# Altium PCB ESP32Programmer.PcbDoc
Units mm, origin at the board's own origin, x right, y up, seen from the top; angles counter-clockwise.
Board outline 52.4 x 18 mm, 2 copper layers (Top Layer, Bottom Layer), stack 1.57 mm thick; 38 components, 24 nets, 126 pads, 116 vias.
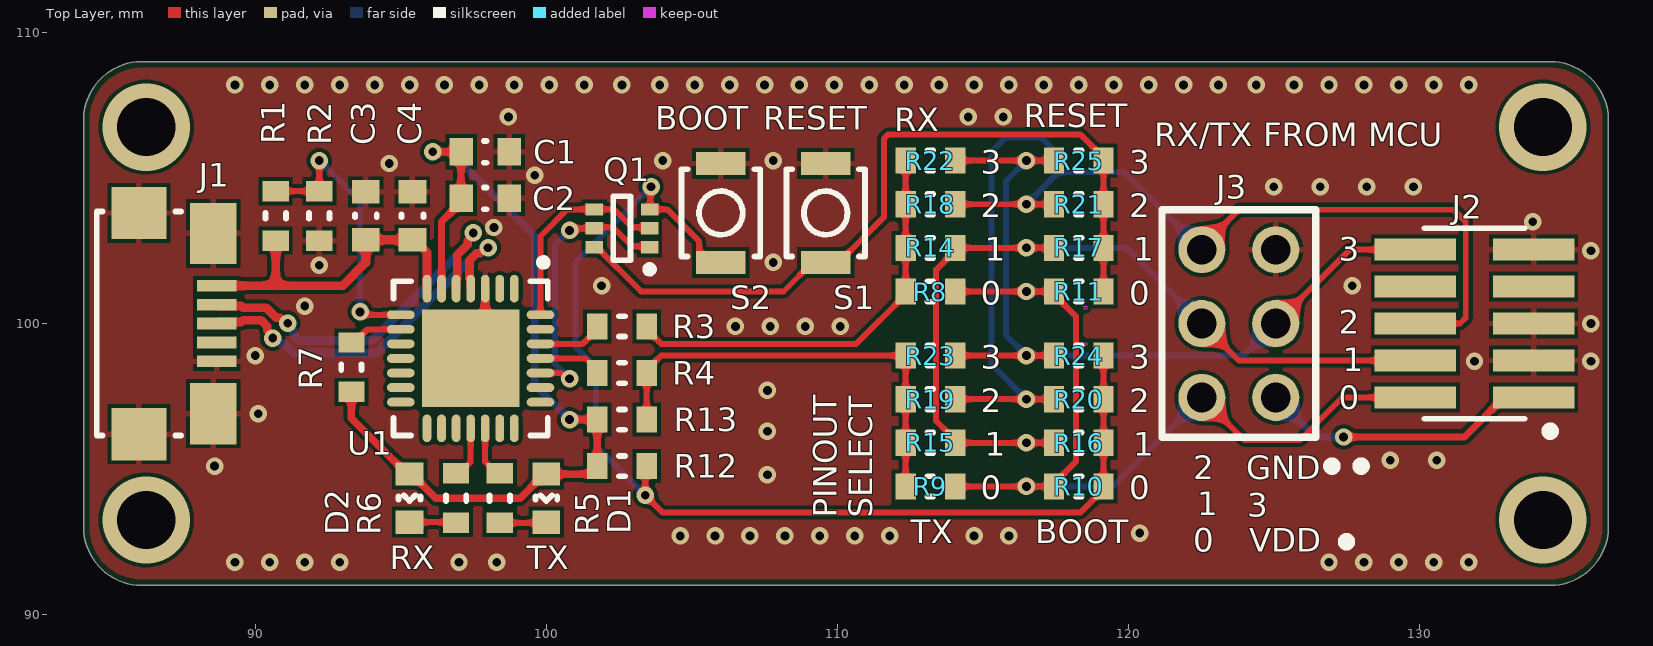
[diagram p0: Top Layer view]
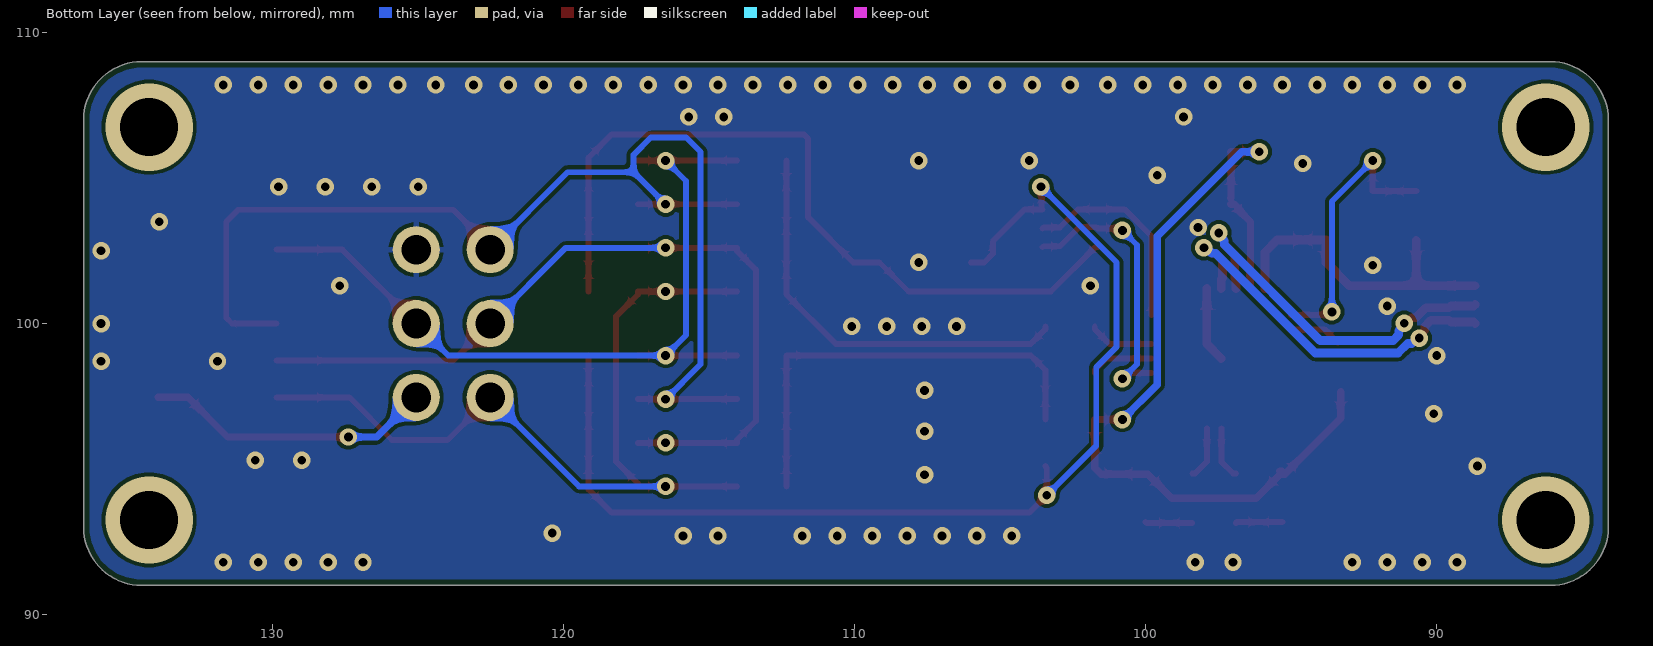
[diagram p1: Bottom Layer view, seen from below]
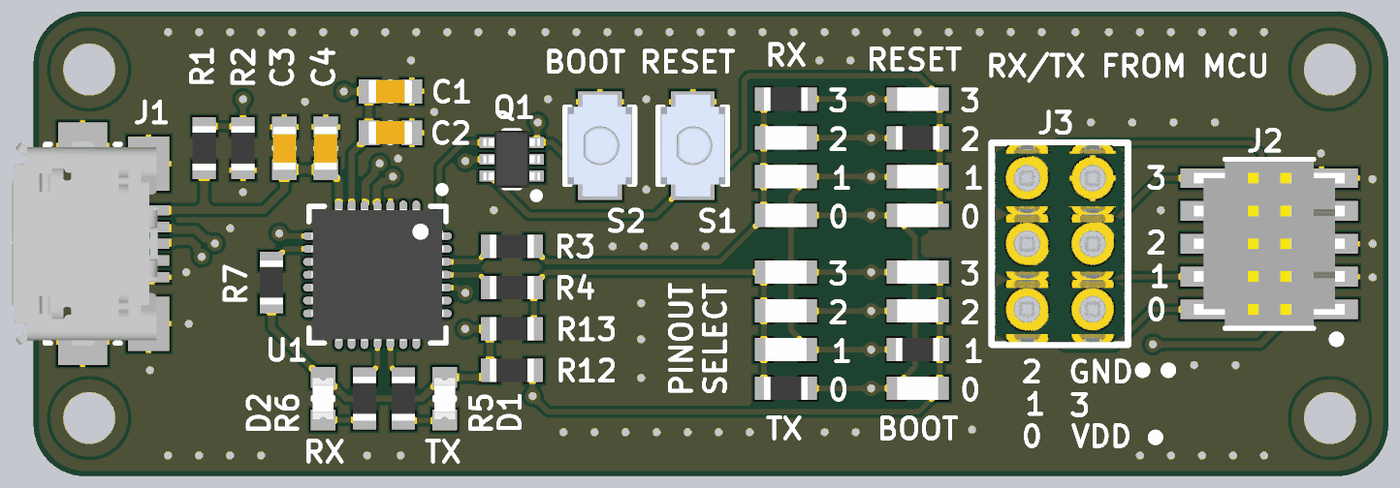
[diagram p2: 3D render of the assembled board from above, using the file's embedded part models]

## Layer stack, top to bottom
Top Solder: solder mask 0.0127, Solder Resist, Dk 3.8
Top Layer: signal copper 0.035
Dielectric: core 1.5, FR-4, Dk 4.5
Bottom Layer: signal copper 0.035
Bottom Solder: solder mask 0.0127, Solder Resist, Dk 3.8

## Board outline
84.1,93 84.1,107 cw(c86.1,107) 86.1,109 134.5,109 cw(c134.5,107) 136.5,107 136.5,93 cw(c134.5,93) 134.5,91 86.1,91 cw(c86.1,93)

## Design rules (kind name [scope] priority, off if disabled: settings)
BoardOutlineClearance [All] p1: gap=0.2 ignorepadtopadclearanceinfootprint=FALSE
Clearance [All] p1: gap=0.127 ignorepadtopadclearanceinfootprint=FALSE except(0.25: Arc-Hole Track-Hole SMDPad-Hole THPad-Hole Via-Hole Fill-Hole Poly-Hole Region-Hole Text-Hole)
ComponentClearance [All] p1: gap=0.127 collisioncheckmode=3 verticalgap=0.127 showdistances=TRUE
DiffPairsRouting [All] p1: maxlimit=0.127 minlimit=0.127 mostfreqgap=0.127 toplayer_minwidth=0.3 toplayer_maxwidth=0.3 toplayer_prefwidth=0.3 bottomlayer_minwidth=0.3 bottomlayer_maxwidth=0.3 bottomlayer_prefwidth=0.3 impedanceprofiledriven=TRUE impedanceprofileid={8DA9B725-9442-458C-9C26-8CCA449BAAD7} impedanceprofilevalue=90.000000 maxuncoupledlength=12.7
Height [All] p1: minheight=0 maxheight=1816.048 prefheight=12.7
HoleSize [All] p1: absolutevalues=TRUE maxlimit=6.3 minlimit=0.3 maxpercent=80.000 minpercent=20.000
HoleToHoleClearance [All] p1: gap=0.25 allowstackedmicrovias=FALSE
MinimumAnnularRing [All] p1: minimumring=0.13
MinimumSolderMaskSliver [All] p1: minsoldermaskwidth=0
PlaneClearance [All] p1: clearance=0.127
PlaneConnect PlaneConnectPowerPads [InPadClass('PowerPads')] p1: planeconnectstyle=Direct reliefexpansion=0.508 reliefentries=4 reliefconductorwidth=0.254 reliefairgap=0.254
PlaneConnect [All] p2: pad.planeconnectstyle=Relief pad.reliefexpansion=0.3 pad.reliefentries=4 pad.reliefconductorwidth=0.127 pad.reliefairgap=0.127 via.planeconnectstyle=Direct via.reliefexpansion=0.3 via.reliefentries=4 via.reliefconductorwidth=0.127 via.reliefairgap=0.127
PolygonConnect PolygonConnectPowerPads [All vs (InPadClass('PowerPads'))] p1: connectstyle=Direct reliefconductorwidth=0.254 reliefentries=4 polygonreliefangle="90 Angle" airgapwidth=0.254
PolygonConnect [All] p2: thpad.connectstyle=Relief thpad.reliefconductorwidth=0.203 thpad.reliefentries=4 thpad.polygonreliefangle="90 Angle" thpad.airgapwidth=0.127 smdpad.connectstyle=Relief smdpad.reliefconductorwidth=0.203 smdpad.reliefentries=4 smdpad.polygonreliefangle="90 Angle" smdpad.airgapwidth=0.127 via.connectstyle=Direct via.reliefconductorwidth=0.127 via.reliefentries=4 via.polygonreliefangle="90 Angle" via.airgapwidth=0.127
RoutingVias [All] p1: holewidth=0.3 width=0.6 viastyle="Through Hole" minholewidth=0.3 minwidth=0.6 maxholewidth=0.6 maxwidth=6.6
SilkToSilkClearance [All] p1: silktosilkclearance=0
SilkToSolderMaskClearance [IsPad] p1: minsilkscreentomaskgap=0.127 clearancetoexposedcopper=TRUE
SolderMaskExpansion [All] p1: expansion=0.075 istentingtop=FALSE
Width [All] p1: maxlimit=25.4 minlimit=0.127 preferedwidth=0.127 minimp=50.000000 maximp=50.000000 favimp=50.000000
20 further rules are at their usual default settings.

## Classes and differential pairs
differential pair USB_DATA: +USB_DATA_P -USB_DATA_N

## Components (designator, comment, footprint, x,y, rotation, side; value= is the part's Value field where it differs from the comment)
C1 "Capacitor" CAPC1608X09N 97.9,105.9 r180 top value=4.7uF
C2 "Capacitor" CAPC1608X09N 97.9,104.3 r180 top value=0.1uF
C3 "Capacitor" CAPC1608X09N 93.8,103.7 r270 top value=4.7uF
C4 "Capacitor" CAPC1608X09N 95.4,103.7 r270 top value=0.1uF
D1 "LED" DIOC1608X09N 100,94 r270 top
D2 "LED" DIOC1608X09N 95.3,94 r270 top
J1 "10118192-0001LF" 10118192-0001LF 86,100 r270 top
J2 "FTSH-105-01-L-DV-K-TR" FTSH-105-01-L-DV-K-TR 131.9,100 r90 top
J3 "0010977066" "3X2 MALE HEADER" 123.8,100 r90 top
Q1 "DMN63D8LDW-7" SOT65P210X110-6N 102.598,103.273 r180 top
R1 "Resistor" RESC1608X06N 90.7,103.7 r90 top value=22.1k
R2 "Resistor" RESC1608X06N 92.2,103.7 r270 top value=47.5k
R3 "Resistor" RESC1608X06N 102.6,99.9 r180 top value=1k
R4 "Resistor" RESC1608X06N 102.6,98.3 r180 top value=1k
R5 "Resistor" RESC1608X06N 98.4,94 r90 top value=1k
R6 "Resistor" RESC1608X06N 96.9,94 r90 top value=1k
R7 "Resistor" RESC1608X06N 93.3,98.5 r90 top value=1k
R8 "Resistor" RESC1608X06N 113.2,101.1 r0 top value=0
R9 "Resistor" RESC1608X06N 113.2,94.4 r0 top value=0
R10 "Resistor" RESC1608X06N 118.3,94.4 r180 top value=0
R11 "Resistor" RESC1608X06N 118.3,101.1 r180 top value=0
R12 "Resistor" RESC1608X06N 102.6,95.1 r0 top value=10k
R13 "Resistor" RESC1608X06N 102.6,96.7 r0 top value=10k
R14 "Resistor" RESC1608X06N 113.2,102.6 r0 top value=0
R15 "Resistor" RESC1608X06N 113.2,95.9 r0 top value=0
R16 "Resistor" RESC1608X06N 118.3,95.9 r180 top value=0
R17 "Resistor" RESC1608X06N 118.3,102.6 r180 top value=0
R18 "Resistor" RESC1608X06N 113.2,104.1 r0 top value=0
R19 "Resistor" RESC1608X06N 113.2,97.4 r0 top value=0
R20 "Resistor" RESC1608X06N 118.3,97.4 r180 top value=0
R21 "Resistor" RESC1608X06N 118.3,104.1 r180 top value=0
R22 "Resistor" RESC1608X06N 113.2,105.6 r0 top value=0
R23 "Resistor" RESC1608X06N 113.2,98.9 r0 top value=0
R24 "Resistor" RESC1608X06N 118.3,98.9 r180 top value=0
R25 "Resistor" RESC1608X06N 118.3,105.6 r180 top value=0
S1 "B3U-1000P" B3U-1000P 109.6,103.8 r90 top
S2 "B3U-1000P" B3U-1000P 106,103.8 r90 top
U1 "CP2102N-A02-GQFN28R" QFN50P500X500X80_HS-29N 97.4,98.8 r270 top

## Footprints (in the part's own frame and the unit in brackets; to place one, negate y for a bottom-side part, rotate by r counter-clockwise, add the part's x,y. Pads: shape width x height; smd on the part's side, far side on the other; paste and mask are expansions set on the pad)
"3X2 MALE HEADER" [mm] "CONN HEADER VERT 6POS 2.54MM"
  round 1.62 hole 1.02: 1(-2.54,-1.27) 2(-2.54,1.27) 3(0,-1.27) 4(0,1.27) 5(2.54,-1.27) 6(2.54,1.27)
  silkscreen extent -3.91,-2.64 3.91,2.64, body extent -3.81,-2.54 3.81,2.54, height 10.43
10118192-0001LF [mm] "Conn Micro USB 2.0 Type B RCP 5 POS 0.65mm Solder RA SMD 5 Terminal 1 Port T/R"
  rect 0.4x1.35 smd: 1(-1.3,2.675) 2(-0.65,2.675) 3(0,2.675) 4(0.65,2.675) 5(1.3,2.675)
  rect 1.8x1.9 smd: 6(-3.8,0) 6(3.8,0)
  rect 2.1x1.6 smd: 6(-3.1,2.55) 6(3.1,2.55)
  silkscreen extent -3.85,-1.45 3.85,1.45, body extent -3.96,-2.76 3.96,2.9, height 2.75
B3U-1000P [mm] "SWITCH TACTILE SPST-NO 0.05A 12V"
  rect 0.8x1.7 smd: 1(-1.7,0) 2(1.7,0)
  silkscreen extent -1.5,-1.35 1.5,1.35, body extent -2,-1.26 2,1.24, height 1.6
CAPC1608X09N [mm] "Chip Capacitor, 2-Leads, Body 1.60x0.80mm, IPC Medium Density"
  rect 0.8x0.95 smd: 1(-0.825,0) 2(0.825,0)
  silkscreen extent -0.05,-0.38 0.05,0.38, body extent -0.85,-0.45 0.85,0.45, height 0.9
DIOC1608X09N [mm] "Chip Diode, 2-Leads, Body 1.60x0.80mm, IPC Medium Density"
  rect 0.8x0.95 smd: 1(-0.825,0) 2(0.825,0)
  silkscreen extent -0.1,-0.38 0.1,0.38, body extent -0.8,-0.4 0.8,0.4, height 0.8
FTSH-105-01-L-DV-K-TR [mil] "CONN HEADER SMD 10POS 1.27MM"
  rect 30x110 smd: 1(-100,-80) 2(-100,80) 3(-50,-80) 4(-50,80) 5(0,-80) 6(0,80) 7(50,-80) 8(50,80) 9(100,-80) 10(100,80)
  silkscreen extent -150,-106 129,67, body extent -125,-115 125,115, height 240
QFN50P500X500X80_HS-29N [mm] "QFN, 28-Leads, Body 5.00x5.00mm, Pitch 0.50mm, Thermal Pad 3.35x3.35mm, IPC Medium Density"
  oval 0.95x0.3 smd: 1(-2.4,1.5) 2(-2.4,1) 3(-2.4,0.5) 4(-2.4,0) 5(-2.4,-0.5) 6(-2.4,-1) 7(-2.4,-1.5) 15(2.4,-1.5) 16(2.4,-1) 17(2.4,-0.5) 18(2.4,0) 19(2.4,0.5) 20(2.4,1) 21(2.4,1.5)
  oval 0.3x0.95 smd: 8(-1.5,-2.4) 9(-1,-2.4) 10(-0.5,-2.4) 11(0,-2.4) 12(0.5,-2.4) 13(1,-2.4) 14(1.5,-2.4) 22(1.5,2.4) 23(1,2.4) 24(0.5,2.4) 25(0,2.4) 26(-0.5,2.4) 27(-1,2.4) 28(-1.5,2.4)
  rect 3.35x3.35 smd: 29(0,0)
  silkscreen extent -3.42,-2.65 2.65,2.65, body extent -2.55,-2.55 2.55,2.55, height 0.8
RESC1608X06N [mm] "Chip Resistor, 2-Leads, Body 1.60x0.80mm, IPC Medium Density"
  rect 0.7x0.9 smd: 1(-0.85,0) 2(0.85,0)
  silkscreen extent -0.1,-0.35 0.1,0.35, body extent -0.85,-0.45 0.85,0.45, height 0.55
SOT65P210X110-6N [mm] "SOT23, 6-Leads, Body 2.00x2.10mm, Pitch 0.65mm, IPC Medium Density"
  rect 0.6x0.42 smd: 1(-0.95,0.65) 2(-0.95,0) 3(-0.95,-0.65) 4(0.95,-0.65) 5(0.95,0) 6(0.95,0.65)
  silkscreen extent -1.08,-1.1 0.3,1.53, body extent -1.1,-1.1 1.1,1.1, height 1.1

## Part data
C1 C3: "General purpose capacitor", Package=0603, Rated Voltage=10V
C2 C4: "General purpose capacitor", Package=0603, Rated Voltage=50V
D1 D2: "General purpose LED"
J1: "Conn Micro USB 2.0 Type B RCP 5 POS 0.65mm Solder RA SMD 5 Terminal 1 Port T/R", Color=Black, Current Rating=1.8A, Flammability Rating="UL94 V-0", Insulation Resistance=1GR, Manufacturer="Framatome Connectors", Max Operating Temperature=85°C, Max Voltage Rating (AC)=100V, Min Operating Temperature=-55°C, Package Quantity=1400, ComponentLink1Description=https://datasheet.ciiva.com/26853/getdatasheetpartid-418041-26853891.pdf?src-supplier=Verical, ComponentLink1URL=https://datasheet.ciiva.com/26853/getdatasheetpartid-418041-26853891.pdf?src-supplier=Verical, ComponentLink2Description=https://datasheet.ciiva.com/851/10118192-851112.pdf?src-supplier=Digi-Key, ComponentLink2URL=https://datasheet.ciiva.com/851/10118192-851112.pdf?src-supplier=Digi-Key, ComponentLink3Description=https://datasheet.ciiva.com/4598/10118192ac-197249-4598796.pdf?src-supplier=Mouser, ComponentLink3URL=https://datasheet.ciiva.com/4598/10118192ac-197249-4598796.pdf?src-supplier=Mouser, ComponentLink4Description=http://datasheet.octopart.com/10118192-0001LF-FCI-datasheet-55953129.pdf?src-supplier=TME, ComponentLink4URL=http://datasheet.octopart.com/10118192-0001LF-FCI-datasheet-55953129.pdf?src-supplier=TME, ComponentLink5Description=http://datasheet.octopart.com/10118192-0001LF-FCI-datasheet-13423637.pdf?src-supplier=Allied+Electronics, ComponentLink5URL=http://datasheet.octopart.com/10118192-0001LF-FCI-datasheet-13423637.pdf?src-supplier=Allied+Electronics, ComponentLink6Description=http://datasheet.octopart.com/10118192-0001LF-Amphenol-datasheet-96019471.pdf?src-supplier=Newark, ComponentLink6URL=http://datasheet.octopart.com/10118192-0001LF-Amphenol-datasheet-96019471.pdf?src-supplier=Newark, ComponentLink7Description=http://datasheet.octopart.com/10118192-0001LF-Amphenol-ICC-datasheet-96019471.pdf?src-supplier=Element14, ComponentLink7URL=http://datasheet.octopart.com/10118192-0001LF-Amphenol-ICC-datasheet-96019471.pdf?src-supplier=Element14, ComponentLink8Description=http://datasheet.octopart.com/10118192-0001LF-Amphenol-ICC-datasheet-55953129.pdf?src-supplier=Future+Electronics, ComponentLink8URL=http://datasheet.octopart.com/10118192-0001LF-Amphenol-ICC-datasheet-55953129.pdf?src-supplier=Future+Electronics, ComponentLink9Description=http://datasheet.octopart.com/10118192-0001LF-Amphenol-ICC-datasheet-13423637.pdf?src-supplier=Allied+Electronics, ComponentLink9URL=http://datasheet.octopart.com/10118192-0001LF-Amphenol-ICC-datasheet-13423637.pdf?src-supplier=Allied+Electronics, ComponentLink10Description=http://datasheet.octopart.com/10118192-0001LF-ICC-datasheet-96019471.pdf?src-supplier=Farnell, ComponentLink10URL=http://datasheet.octopart.com/10118192-0001LF-ICC-datasheet-96019471.pdf?src-supplier=Farnell, ComponentLink11Description=http://datasheet.octopart.com/10118192-0001LF-ICC-datasheet-55953129.pdf?src-supplier=Farnell, ComponentLink11URL=http://datasheet.octopart.com/10118192-0001LF-ICC-datasheet-55953129.pdf?src-supplier=Farnell, Connector Type=USB, Contact Material="Copper Alloy", Contact Plating=Gold, Depth=5.57mm, Features=Shielded, Gender=Receptacle, Housing Material=Polymer, Lead Free="Lead Free", Length=7.86mm, Manufacturer Part Number=10118192-0001LF, Mount="Surface Mount", Number of Contacts=5, Number of Ports=1, Number of Terminals=5, Orientation="Right Angle", Packaging="Tape and Reel", Pitch=0.65mm, Pricing 1="1 = 0.43000, 10 = 0.40500, 25 = 0.36440, 50 = 0.32400, 100 = 0.31040, 250 = 0.28344, 500 = 0.26994 (USD)", Radiation Hardening=No, REACH SVHC="No SVHC", Stock 1=43734, Supplier 1=Digi-Key, Termination=Solder, USB Standard="USB 2.0", Voltage Rating=100V
J2: "SAMTEC - FTSH-105-01-L-DV-K-TR - CONNECTOR, HEADER, 10 POSITION, 2ROW, 1.27MM", Color=Black, Current Rating=1.75A, Manufacturer=Samtec, Max Operating Temperature=125°C, Min Operating Temperature=-55°C, Package Quantity=550, Category="Headers and Wire Housings", ComponentLink1Description=https://datasheet.ciiva.com/739/ftsh-1xx-xx-xxx-dv-xxx-mkt-739005.pdf?src-supplier=Digi-Key, ComponentLink1URL=https://datasheet.ciiva.com/739/ftsh-1xx-xx-xxx-dv-xxx-mkt-739005.pdf?src-supplier=Digi-Key, ComponentLink2Description=https://datasheet.ciiva.com/23735/81359-23735917.pdf?src-supplier=Newark, ComponentLink2URL=https://datasheet.ciiva.com/23735/81359-23735917.pdf?src-supplier=Newark, ComponentLink3Description=https://datasheet.ciiva.com/10245/ftsh-mt-10245289.pdf?src-supplier=Avnet, ComponentLink3URL=https://datasheet.ciiva.com/10245/ftsh-mt-10245289.pdf?src-supplier=Avnet, Connector Type="Male Pin", Contact Material=Bronze, Contact Mating Length=0.12inch, Contact Plating=Gold, Depth=3.43mm, Gender=Male, Housing Color=Black, Housing Material=Polymer, Lead Free="Lead Free", Length=6.35mm, Manufacturer Part Number=FTSH-105-01-L-DV-K-TR, Max Current Rating=1.75A, Mount="Surface Mount", Number of Contacts=10, Number of Positions=10, Number of Rows=2, Orientation=Straight, Packaging="Tape and Reel", Pitch=1.27mm, Pricing 1="1=3.60000, 10=3.45800, 100=2.88200 (USD)", Radiation Hardening=No, REACH SVHC="No SVHC", RoHS=Yes, Row Spacing=0.05inch, Stock 1=307, Supplier 1=Digi-Key, Termination=Solder
J3: "Conn Unshrouded Header HDR 6 POS 2.54mm Solder ST Thru-Hole C-GridR Bag", Color=Black, Contact Resistance=15mR, Manufacturer=Molex, Max Operating Temperature=105°C, Min Operating Temperature=-40°C, Category="Headers and Wire Housings", ComponentLink1Description=https://datasheet.ciiva.com/742/010879125-sd-742670.pdf?src-supplier=Digi-Key, ComponentLink1URL=https://datasheet.ciiva.com/742/010879125-sd-742670.pdf?src-supplier=Digi-Key, ComponentLink2Description=https://datasheet.ciiva.com/10087/0010977066-pcb-headers-10087740.pdf?src-supplier=Avnet, ComponentLink2URL=https://datasheet.ciiva.com/10087/0010977066-pcb-headers-10087740.pdf?src-supplier=Avnet, Connector Type="Male Pin", Contact Material="Copper Alloy", Contact Mating Length=0.32inch, Contact Plating=Gold, Contact Type="Male Pin", Depth=5.08mm, Gender=Male, Housing Color=Black, Housing Material=Polymer, Length=7.62mm, Manufacturer Part Number=0010977066, Mount="Through Hole", Number of Contacts=6, Number of Positions=6, Number of Rows=2, Orientation=Straight, Packaging=Bulk, Pitch=2.54mm, Pricing 1="1=0.51000, 10=0.43300, 100=0.33700, 1000=0.26481, 5000=0.23271, 10000=0.21666 (USD)", RoHS=Yes, RoHS Compliant=Yes, Row Spacing=0.1inch, Series="C-Grid® 70280", Stock 1=5007, Supplier 1=Digi-Key, Termination=Solder
Q1: "DIODES INC. - DMN63D8LDW-7 - Dual MOSFET, N Channel, 30 V, 260 mA, 2.8 ohm, SOT-363, Surface Mount", Case/Package=SOT-363, Continuous Drain Current (ID)=260mA, Drain to Source Breakdown Voltage=30V, Drain to Source Resistance=2.8R, Gate to Source Voltage (Vgs)=20V, Input Capacitance=22pF, Manufacturer=Diodes, Max Operating Temperature=150°C, Max Power Dissipation=300mW, Min Operating Temperature=-55°C, Package Quantity=3000, Power Dissipation=400mW, Threshold Voltage=1.5V, Category=MOSFETs, ComponentLink1Description=https://datasheet.ciiva.com/30023/dmn63d8ldw-30023824.pdf?src-supplier=Avnet, ComponentLink1URL=https://datasheet.ciiva.com/30023/dmn63d8ldw-30023824.pdf?src-supplier=Avnet, ComponentLink2Description=https://datasheet.ciiva.com/6384/dmn63d8ldw-6384534.pdf?src-supplier=Digi-Key, ComponentLink2URL=https://datasheet.ciiva.com/6384/dmn63d8ldw-6384534.pdf?src-supplier=Digi-Key, Contact Plating=Tin,Matte, Drain to Source Voltage (Vdss)=30V, Element Configuration=Dual, Fall Time=6.3ns, FET Type="2 N-Channel", Height=1mm, Lead Free="Lead Free", Length=2.2mm, Manufacturer Part Number=DMN63D8LDW-7, Mount="Surface Mount", Number of Channels=2, Number of Elements=2, Number of Pins=6, Packaging="Tape and Reel", Pricing 1="1=0.30000, 10=0.24300, 25=0.20360, 100=0.09950, 250=0.09796, 500=0.08302, 1000=0.05768 (USD)", Radiation Hardening=No, Rds On Max=2.8R, REACH SVHC="No SVHC", Rise Time=3.2ns, RoHS=Yes, Stock 1=67979, Supplier 1=Digi-Key, Turn-Off Delay Time=12ns, Turn-On Delay Time=3.3ns, Weight=0.000212oz, Width=1.35mm
R1 R2 R3 R4 R5 R6 R7 R8 R9 R10 R11 R12 R13 R14 R15 R16 R17 R18 R19 R20 R21 R22 R23 R24 R25: "General purpose resistor", Package=0603
S1 S2: "OMRON ELECTRONIC COMPONENTS         B3U-1000P            SWITCH, SPST-NO, 0.05A, 12V, SMD", Contact Current Rating=50mA, Contact Resistance=100mR, Insulation Resistance=100MR, Manufacturer=Omron, Max Operating Temperature=70°C, Max Voltage Rating (DC)=12V, Min Operating Temperature=-25°C, Operating Force=1.5N, Package Quantity=1, Ratings="Dust Proof,IP40", Actuator Length=0.4mm, Actuator Type=Standard, ComponentLink1Description=https://datasheet.ciiva.com/26917/getdatasheetpartid-552554-26917552.pdf?src-supplier=Verical, ComponentLink1URL=https://datasheet.ciiva.com/26917/getdatasheetpartid-552554-26917552.pdf?src-supplier=Verical, ComponentLink2Description=https://datasheet.ciiva.com/22696/1685550-22696214.pdf?src-supplier=Element14, ComponentLink2URL=https://datasheet.ciiva.com/22696/1685550-22696214.pdf?src-supplier=Element14, ComponentLink3Description=https://datasheet.ciiva.com/1532/1685550-1532680.pdf?src-supplier=Element14, ComponentLink3URL=https://datasheet.ciiva.com/1532/1685550-1532680.pdf?src-supplier=Element14, ComponentLink4Description=https://datasheet.ciiva.com/1634/1685550-1634396.pdf?src-supplier=Farnell, ComponentLink4URL=https://datasheet.ciiva.com/1634/1685550-1634396.pdf?src-supplier=Farnell, ComponentLink5Description=https://datasheet.ciiva.com/14142/b3u-eng-datasheet-14142540.pdf?src-supplier=Distrelec, ComponentLink5URL=https://datasheet.ciiva.com/14142/b3u-eng-datasheet-14142540.pdf?src-supplier=Distrelec, ComponentLink6Description=https://datasheet.ciiva.com/2900/b3u-1110-2900029.pdf?src-supplier=Digi-Key, ComponentLink6URL=https://datasheet.ciiva.com/2900/b3u-1110-2900029.pdf?src-supplier=Digi-Key, ComponentLink7Description=https://datasheet.ciiva.com/16155/en-b3u-16155021.pdf?src-supplier=Onlinecomponents.com, ComponentLink7URL=https://datasheet.ciiva.com/16155/en-b3u-16155021.pdf?src-supplier=Onlinecomponents.com, ComponentLink8Description=https://datasheet.ciiva.com/2900/b3u-1110-2900030.pdf?src-supplier=Digi-Key, ComponentLink8URL=https://datasheet.ciiva.com/2900/b3u-1110-2900030.pdf?src-supplier=Digi-Key, ComponentLink9Description=https://datasheet.ciiva.com/16862/70176037-16862846.pdf?src-supplier=Allied+Electronics, ComponentLink9URL=https://datasheet.ciiva.com/16862/70176037-16862846.pdf?src-supplier=Allied+Electronics, ComponentLink10Description=https://datasheet.ciiva.com/2900/b3u-1110-2900031.pdf?src-supplier=Digi-Key, ComponentLink10URL=https://datasheet.ciiva.com/2900/b3u-1110-2900031.pdf?src-supplier=Digi-Key, Contact Material=Silver, Current Rating=50mA, Depth=2.5mm, Electrical Life=200000Cycles, Height=1.2mm, Illumination Type=Non-Illuminated,Illuminated, Lead Free="Lead Free", Length=4mm, Manufacturer Part Number=B3U-1000P, Max Current Rating=50mA, Mechanical Life=200000Cycles, Mount="Surface Mount", Orientation=Straight, Packaging="Tape and Reel", Pricing 1="1=0.84000, 10=0.80700, 25=0.76080, 50=0.66960, 100=0.60880, 250=0.57836, 500=0.56312, 1000=0.44137 (USD)", REACH SVHC=Unknown, RoHS=Yes, Stock 1=38234, Supplier 1=Digi-Key, Switch Function=Off-Mom, Switch Travel=0.15mm, Termination=SMD/SMT, Throw Configuration=SPST, Voltage Rating (DC)=12V, Weight=0.000776oz, Width=3mm
U1: "Full Speed USB to UART Bridge USB 2.0 3.3V T/R Automotive 28-Pin QFN EP", Manufacturer="Silicon Labs", ComponentLink1Description=https://4donline.ihs.com/images/VipMasterIC/IC/SILC/SILC-S-A0007770867/SILC-S-A0007770867-1.pdf?hkey=6D3A4C79FDBF58556ACFDE234799DDF0&src-supplier=Farnell, ComponentLink1URL=https://4donline.ihs.com/images/VipMasterIC/IC/SILC/SILC-S-A0007770867/SILC-S-A0007770867-1.pdf?hkey=6D3A4C79FDBF58556ACFDE234799DDF0&src-supplier=Farnell, Manufacturer Part Number=CP2102N-A02-GQFN28R, Pricing 1="1=1.47000 (USD)", RoHS=Yes, Stock 1=16070, Supplier 1=Digi-Key

## Via types
v1: diameter 0.6, hole 0.3, Top Layer to Bottom Layer, tented both sides, 112 vias
v2: diameter 3, hole 2, Top Layer to Bottom Layer, 4 vias

## Nets (pads, with @x,y where several pads share a name; then routed paths per layer and width w, separated by ;. In a path a pad name is that pad's centre, name@x,y a point inside that pad or via, vN(x,y) a via of type N, cw(c..) or ccw(c..) an arc to the next point about the centre after c; other vN are vias at no path point)
3V3: C1.2 C2.2 D1.1 D2.1 R7.1 R12.1 R13.1 U1.6 | length 30.9
  Top Layer w0.254: R7.1 93.3,96.75 D2.1@95.225,94.825 ; D2.1 95.375,94.825 96.2,94 99.1,94 99.925,94.825 D1.1 101.527,94.825 101.75,95.048 R12.1 R13.1 v1(100.8,96.7) ; D2.1@95.325,94.925 D2.1@95.4,94.925 ; v1(96.1,105.9) C1.2 97.067,105.892 97.067,104.308 C2.2 ; U1.6 96.4,103.5 96.802,103.902 96.802,103.952 96.95,104.1 C2.2@97.075,104.1
  Bottom Layer w0.254: v1(96.1,105.9) 96.7,105.9 99.6,103 99.6,97.9 v1(100.8,96.7)
DTR: Q1.2 Q1.4 U1.28 | length 7.1
  Top Layer w0.203: U1.28 99.8,103 100.723,103.923 Q1.4 102.328,103.923 102.944,103.307 103.514,103.307 Q1.2
GND: C1.1 C2.1 C3.1 C4.1 J1.5 J1.6 J2.3 J2.5 J2.9 J3.5 R2.2 S1.2 S2.2 U1.3 U1.29 | length 2.6
  Top Layer w0.3: U1.29 97.9,99.3 U1.3
  other v1: 89.3,91.8 90.5,91.8 91.7,91.8 92.9,91.8 97,91.8 98.3,91.8 126.9,91.8 128.1,91.8 129.3,91.8 130.5,91.8 131.7,91.8 104.6,92.7 105.8,92.7 107,92.7 108.2,92.7 109.4,92.7 110.6,92.7 111.8,92.7 114.7,92.7 115.9,92.7 120.4,92.8 107.6,94.8 88.6,95.1 129,95.3 130.6,95.3 107.6,96.3 90.1,96.9 107.6,97.7 131.9,98.7 135.9,98.7 90,98.9 106.5,99.9 107.7,99.9 108.9,99.9 110.1,99.9 135.9,100 91.7,100.6 101.9,101.3 127.7,101.3 92.2,102 107.8,102.1 135.9,102.5 98.2,103.3 133.9,103.5 125,104.7 126.6,104.7 128.2,104.7 129.8,104.7 99.6,105.1 94.6,105.5 104,105.6 107.8,105.6 98.7,107.1 114.5,107.1 115.7,107.1 89.3,108.2 90.5,108.2 91.7,108.2 92.9,108.2 94.1,108.2 95.3,108.2 96.5,108.2 97.7,108.2 98.9,108.2 100.1,108.2 101.3,108.2 102.6,108.2 103.9,108.2 105.1,108.2 106.3,108.2 107.5,108.2 108.7,108.2 109.9,108.2 111.1,108.2 112.3,108.2 113.5,108.2 114.7,108.2 115.9,108.2 117.1,108.2 118.3,108.2 119.5,108.2 120.7,108.2 121.9,108.2 123.1,108.2 124.4,108.2 125.7,108.2 126.9,108.2 128.1,108.2 129.3,108.2 130.5,108.2 131.7,108.2
IO0: J2.2 J3.2 R8.2 R9.2 R10.2 R11.2 | length 30
  Top Layer w0.203: R9.2 R10.2 117.45,94.5 118.2,95.25 118.2,100.25 117.45,101 R11.2 R8.2 ; J3.2 123.99,96 125.9,96 127.36,97.46 J2.2
  Bottom Layer w0.203: v1(116.5,94.4) 119.47,94.4 J3.2
  other v1: 116.5,101.1
IO1: J2.4 J3.4 R14.2 R15.2 R16.2 R17.2 | length 29
  Top Layer w0.203: R16.2 R15.2 114.05,96 113.4,96.65 113.4,101.85 114.05,102.5 R14.2 R17.2 ; J3.4 123.8,98.73 J2.4
  Bottom Layer w0.203: v1(116.5,102.6) 119.93,102.6 J3.4
  other v1: 116.5,95.9
IO2: J2.6 J3.6 R18.2 R19.2 R20.2 R21.2 | length 41.7
  Top Layer w0.203: R19.2 R20.2 ; R18.2 R21.2 ; J3.6 122.53,102.64 123.8,103.91 131.19,103.91 131.6,103.5 131.6,100.2 131.4,100 J2.6
  Bottom Layer w0.203: v1(116.5,97.4) 115.3,98.6 115.3,105.9 115.8,106.4 117,106.4 117.6,105.8 117.6,105.2 ; v1(116.5,104.1) 117.6,105.2 ; J3.6 119.87,105.2 117.6,105.2
IO3: J2.10 J3.3 R22.2 R23.2 R24.2 R25.2 | length 28.9
  Top Layer w0.203: R23.2 v1(116.5,98.9) R24.2 ; R22.2 R25.2 ; J3.3 127.61,102.54 J2.10
  Bottom Layer w0.203: v1(116.5,105.6) 115.8,104.9 115.8,99.6 v1(116.5,98.9) 123.97,98.9 124.87,99.8 J3.3@124.87,100
MCU_BOOT: Q1.3 R10.1 R12.2 R16.1 R20.1 R24.1 S2.1 | length 38.9
  Top Layer w0.203: R12.2 103.4,95.05 v1(103.4,94.1) 104,93.5 118.35,93.5 119.15,94.3 R16.1 R20.1 R24.1 ; v1(103.6,104.7) 103.574,104.674 103.574,103.949 Q1.3 104.153,103.923 105.252,102.825 105.252,102.398 105.55,102.1 S2.1
  Bottom Layer w0.203: v1(103.4,94.1) 101.7,95.8 101.7,98.5 101,99.2 101,102.1 v1(103.6,104.7)
MCU_RESET: Q1.6 R11.1 R17.1 R21.1 R25.1 S1.1 | length 26.9
  Top Layer w0.203: Q1.6 101.738,102.623 103.261,101.1 108.15,101.1 109.15,102.1 110.05,102.1 111.6,103.65 111.6,106.35 111.75,106.5 118.35,106.5 119.15,105.7 R25.1 R21.1 R17.1 R11.1
MCU_RX: R3.1 R8.1 R14.1 R18.1 R22.1 | length 14.5
  Top Layer w0.203: R3.1 103.45,99.8 103.95,99.3 110.65,99.3 112.35,101 R14.1 R18.1 R22.1
MCU_TX: R4.1 R9.1 R13.2 R15.1 R19.1 R23.1 | length 15.3
  Top Layer w0.203: R13.2 R4.1 103.45,98.4 103.95,98.9 R23.1 R19.1 R15.1 R9.1
NetD1_2: D1.2 R5.1 | length 1.6
  Top Layer w0.203: R5.1 99.975,93.15 D1.2
NetD2_2: D2.2 R6.1 | length 1.6
  Top Layer w0.203: D2.2 96.875,93.175 R6.1
RST_N: R7.2 U1.9 | length 1.9
  Top Layer w0.203: R7.2@93.4,99.35 93.85,99.8 U1.9 ; R7.2@93.4,99.45 R7.2@93.5,99.45
RTS: Q1.1 Q1.5 U1.24 | length 9.7
  Top Layer w0.203: U1.24 100.498,98.3 100.698,98.1 v1(100.8,98.1) ; v1(100.8,103.2) 100.873,103.273 Q1.5 101.685,103.309 102.291,103.309 102.944,102.657 103.514,102.657 Q1.1
  Bottom Layer w0.203: v1(100.8,98.1) 100.3,98.6 100.3,102.7 v1(100.8,103.2)
RXD: R4.2 U1.25 | length 2.2
  Top Layer w0.203: U1.25 101.35,98.8 101.75,98.4 R4.2
RXT: R6.2 U1.18 | length 1.8
  Top Layer w0.203: R6.2 97,94.85 97.4,95.25 U1.18
TXD: R3.2 U1.26 | length 2.3
  Top Layer w0.203: U1.26 101.25,99.3 101.75,99.8 R3.2
TXT: R5.2 U1.19 | length 1.8
  Top Layer w0.203: U1.19 97.9,95.25 98.3,94.85 R5.2
USB_DATA_N: J1.2 U1.5 | length 12.6
  Top Layer w0.3: J1.2 88.725,100.6 89.516,100.6 89.577,100.539 90.377,100.539 90.716,100.2 90.847,100.2 ; U1.5 96.9,101.525 96.937,101.562 96.937,102.353 97.3,102.716 97.3,102.847
  Bottom Layer w0.3: v1(91.114,100.014) 91.114,99.933 91.3,99.747 91.3,99.616 91.503,99.413 93.997,99.413 97.3,102.716 97.3,102.847 97.486,103.033 v1(97.486,103.114)
USB_DATA_P: J1.3 U1.4 | length 12.6
  Top Layer w0.3: J1.3 88.725,100.05 89.516,100.05 89.577,100.112 90.201,100.112 90.414,99.898 90.414,99.767 ; U1.4 97.4,101.525 97.364,101.562 97.364,102.176 97.602,102.414 97.733,102.414
  Bottom Layer w0.3: v1(90.6,99.5) 90.681,99.5 90.867,99.314 90.998,99.314 91.326,98.986 94.174,98.986 97.602,102.414 97.733,102.414 97.919,102.6 v1(98,102.6)
VBUS: C3.2 C4.2 J1.1 R1.1 U1.7 | length 11.3
  Top Layer w0.305: J1.1 90.7,101.3 ; R1.1 90.7,101.3 ; U1.7 95.9,102.45 95.475,102.875 C4.2 C3.2 93.8,102.1 93,101.3 90.7,101.3
VBUS_SENSE: R1.2 R2.1 U1.8 | length 9.8
  Top Layer w0.203: R1.2 R2.1 v1(92.2,105.6) ; v1(93.6,100.4) 93.707,100.4 93.807,100.3 U1.8
  Bottom Layer w0.203: v1(92.2,105.6) 93.6,104.2 v1(93.6,100.4)
VDD_MCU: J2.1 J3.1 | length 10
  Top Layer w0.254: v1(127.4,96.1) 131.556,96.1 132.916,97.46 J2.1
  Bottom Layer w0.254: J3.1 126.43,96.1 v1(127.4,96.1)
pads on no net: J1.4 J2.7 J2.8 U1.1 U1.2 U1.10 U1.11 U1.12 U1.13 U1.14 U1.15 U1.16 U1.17 U1.20 U1.21 U1.22 U1.23 U1.27
copper on no net:
  other v2: 86.25,93.25 134.25,93.25 86.25,106.75 134.25,106.75

## Polygon pours and split planes (outlines as drawn)
GND on Bottom Layer "GND_L02_P000" (solid, remove dead copper, pour order 0): 84,109 84,91 136.5,91 136.5,109
GND on Top Layer "GND_L01_P001" (solid, remove dead copper, pour order 1): 84,109 84,91 136.5,91 136.5,109

## Keep-outs
Top Layer:
  region: 118.48,100.59 118.58,100.59 118.58,100.49 118.48,100.49
  region: 118.474,99.348 118.574,99.348 118.574,99.248 118.474,99.248

## Silkscreen, mask and mechanical layers (free items; w line width, h text height)
Top Overlay:
  circle w0.4: c127.5,92.5 r0.1
  circle w0.4: c128,95.1 r0.1
  circle w0.4: c127,95.1 r0.1
  text "RESET" at 116.404,106.752 h0.81
  text "BOOT" at 103.752,106.652 h0.81
  text "RESET" at 107.452,106.652 h0.81
  text "RX" at 111.964,106.6 h0.81
  text "RX/TX FROM MCU" at 120.9,106.1 h0.81
  text "3" at 114.929,105.152 h0.81
  text "3" at 120.029,105.152 h0.81
  text "2" at 114.929,103.652 h0.81
  text "2" at 120.029,103.652 h0.81
  text "1" at 115.065,102.152 h0.81
  text "1" at 120.165,102.152 h0.81
  text "3" at 127.229,102.152 h0.81
  text "0" at 114.929,100.652 h0.81
  text "0" at 120.029,100.652 h0.81
  text "2" at 127.229,99.652 h0.81
  text "3" at 114.929,98.452 h0.81
  text "3" at 120.029,98.452 h0.81
  text "1" at 127.365,98.352 h0.81
  text "0" at 127.229,97.052 h0.81
  text "2" at 114.929,96.952 h0.81
  text "2" at 120.029,96.952 h0.81
  text "1" at 115.065,95.452 h0.81
  text "1" at 120.165,95.452 h0.81
  text "2" at 122.229,94.652 h0.81
  text "GND" at 124.052,94.652 h0.81
  text "0" at 114.929,93.952 h0.81
  text "0" at 120.029,93.952 h0.81
  text "1" at 122.365,93.403 h0.81
  text "3" at 124.085,93.354 h0.81
  text "PINOUT / SELECT" at 111.2,93.325 h0.81 r90
  text "TX" at 112.523,92.452 h0.81
  text "BOOT" at 116.81,92.452 h0.81
  text "0" at 122.229,92.152 h0.81
  text "VDD" at 124.152,92.152 h0.81
  text "RX" at 94.623,91.552 h0.81
  text "TX" at 99.323,91.552 h0.81
Mechanical 1:
  lines w0.1: 84,93 ccw(c86,93) 86,91 134.5,91 ccw(c134.5,93) 136.5,93 136.5,107 ccw(c134.5,107) 134.5,109 86,109 ccw(c86,107) 84,107 84,93